# EAGLE board 2_ (EAGLE 5.10)
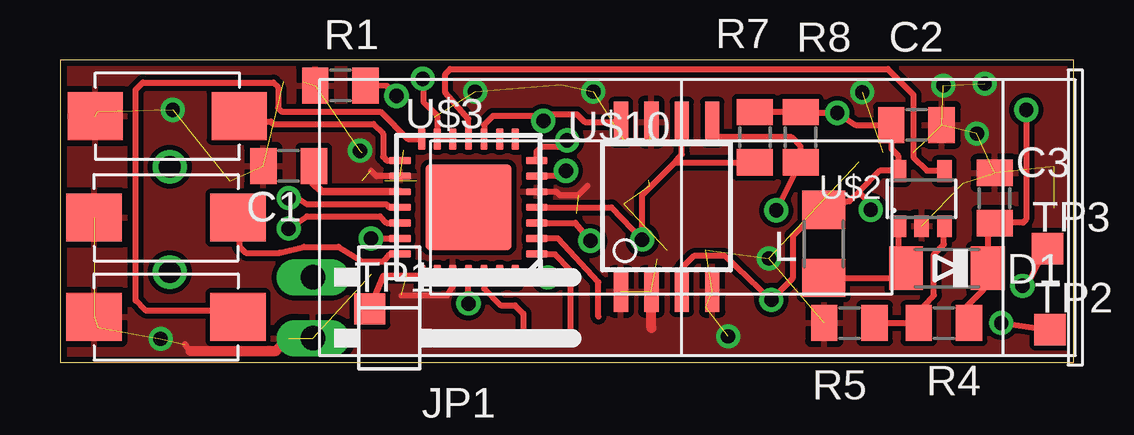
[diagram p0: board, top side]
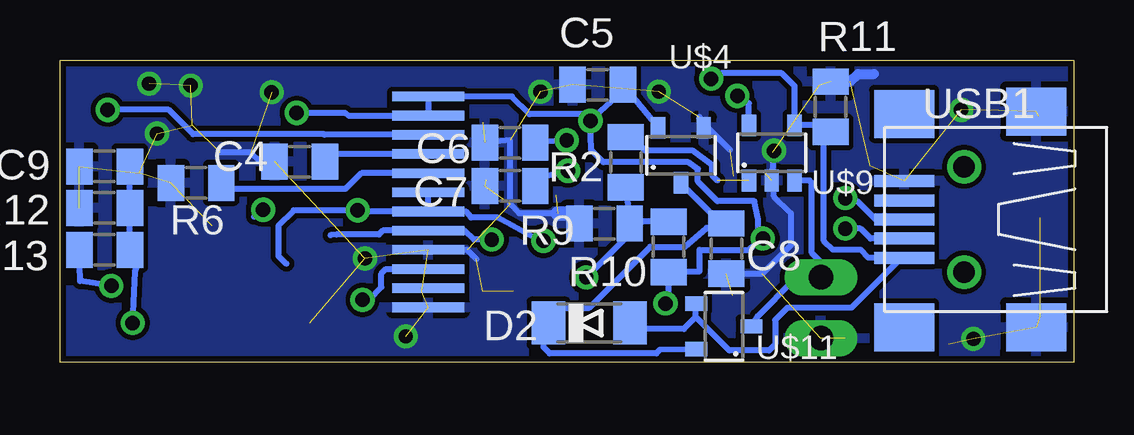
[diagram p1: board, bottom side, seen from below]

Size 42.25 x 12.62 mm. Coordinates in mm from the lower left corner, seen from the top.
Outline: 0,0 42.25,0 42.25,12.62 0,12.62 0,0
Copper layers (1*16): Top 0.035mm / dielectric 1.5mm / Bottom 0.035mm
Design rules "check8": minimum track width 8mil, minimum drill 23mil, track to track 8mil, track to pad 8mil, pad to pad 8mil, via to via 8mil, smd to smd 8mil, copper to edge 10mil, drill to drill 8mil, minimum pad ring 10mil, minimum via ring 8mil, stop-mask expansion 4mil, vias tented up to drill 0mil, thermal gap 10mil

## Footprints (pad centres in the part's own frame; a part is rotated, then mirrored left to right if it is on the bottom)
R0805 = smd 1.1 x 1.5: 1 -1.05,0; 2 1.05,0
MINIMELF = smd 1.4 x 1.8: A 1.7,0; C -1.7,0
1X02/90 = drill 1.016 long: 1 -1.27,-3.81; 2 1.27,-3.81
R1206 = smd 1.6 x 1.803: 1 -1.422,0; 2 1.422,0
TP13SQ = smd 1.3 x 1.3: TP 0,0
DEP096032B-F = smd 3 x 0.4 bottom: 1 1,-4.05; 2 1,-3.25; 3 1,-2.45; 4 1,-1.65; 5 1,-0.85; 6 1,-0.05; 7 1,0.75; 8 1,1.55; 9 1,2.35; 10 1,3.15; 11 1,3.95; 12 1,4.75
SOT23-5 = smd 0.6 x 0.9: 1 -0.99,-1.17; 2 -0.04,-1.17; 3 0.91,-1.17; 4 0.91,1.13; 5 -0.99,1.13
QFN28 = smd 0.9 x 0.3: 1 -2.85,1.95; 2 -2.85,1.3; 3 -2.85,0.65; 4 -2.85,0; 5 -2.85,-0.65; 6 -2.85,-1.3; 7 -2.85,-1.95; 15 2.85,-1.95; 16 2.85,-1.3; 17 2.85,-0.65; 18 2.85,0; 19 2.85,0.65; 20 2.85,1.3; 21 2.85,1.95 | smd 0.3 x 0.9: 8 -1.95,-2.85; 9 -1.3,-2.85; 10 -0.65,-2.85; 11 0,-2.85; 12 0.65,-2.85; 13 1.3,-2.85; 14 1.95,-2.85; 22 1.95,2.85; 23 1.3,2.85; 24 0.65,2.85; 25 0,2.85; 26 -0.65,2.85; 27 -1.3,2.85; 28 -1.95,2.85 | smd 3.6 x 3.6: 29 0,0
SOT23-3 = smd 0.6 x 0.9: 1 0.91,1.13; 2 -0.99,1.13; 3 -0.04,-1.17
SW_SMD_MINI = smd 2.3 x 2: 1 3,0; 2 -3,0
SO-08_208 = smd 0.6 x 1.7: 1 -1.905,-3.43; 2 -0.635,-3.43; 3 0.635,-3.43; 4 1.905,-3.43; 5 1.905,3.63; 6 0.635,3.63; 7 -0.635,3.63; 8 -1.905,3.63
USB-MB-S = smd 2.5 x 0.5: D+ 2.5,0; D- 2.5,0.8; GND 2.5,-1.6; ID 2.5,-0.8; VBUS 2.5,1.6 | smd 2.5 x 2: GND@1 -3,4.5; GND@2 2.5,4.5; GND@3 -3,-4.5; GND@4 2.5,-4.4 | drill 0.9 round: P$5 0,2.2; P$6 0,-2.2

## Placement (x,y rotation side)
C1  10u  [R0805]  9.53,8.2 180 top
C2  10u  [R0805]  35.69,9.91 180 top
C3  10u  [R0805]  38.94,6.86 270 top
C4  10u  [R0805]  32.26,8.38 0 bottom
C5  10u  [R0805]  19.84,11.58 0 bottom
C6  DNP  [R0805]  23.5,9.17 180 bottom
C7  DNP  [R0805]  23.5,7.37 180 bottom
C8  10u  [R0805]  14.48,4.75 270 bottom
C9  10N  [R0805]  40.39,8.18 180 bottom
D1  BAT48  [MINIMELF]  36.96,3.94 180 top
D2  BAT48  [MINIMELF]  20.19,1.65 0 bottom
JP1  [1X02/90]  14.35,2.29 270 top
L  10uH  [R1206]  31.83,4.95 90 top
R1  22k  [R0805]  11.68,11.56 0 top
R2  10K  [R0805]  18.67,8.36 90 bottom
R4  1M  [R0805]  36.83,1.65 180 top
R5  110k  [R0805]  32.89,1.65 180 top
R6  1M8  [R0805]  36.58,7.49 180 bottom
R7  2k2  [R0805]  28.96,9.4 270 top
R8  2k2  [R0805]  30.86,9.4 270 top
R9  10K  [R0805]  19.56,5.79 180 bottom
R10  DNP  [R0805]  16.89,4.83 270 bottom
R11  10k  [R0805]  10.13,10.67 90 bottom
R12  560K  [R0805]  40.39,6.45 180 bottom
R13  560K  [R0805]  40.39,4.7 180 bottom
TP1  PTR1TP13SQ  [TP13SQ]  12.9,2.24 0 top
TP2  PTR1TP13SQ  [TP13SQ]  41.25,1.37 0 top
TP3  PTR1TP13SQ  [TP13SQ]  41.15,4.75 0 top
U$1  DEP096032B  [DEP096032B-F]  25.91,6.35 0 top
U$2  LM2705  [SOT23-5]  35.94,6.86 0 top
U$3  PIC24FJ64GB002  [QFN28]  17.02,6.48 180 top
U$4  MCP1702  [SOT23-3]  16.33,8.66 0 bottom
U$5  SWITCH_MINI  [SW_SMD_MINI]  4.42,6.05 0 top
U$6  SWITCH_MINI  [SW_SMD_MINI]  4.47,10.29 0 top
U$7  SWITCH_MINI  [SW_SMD_MINI]  4.42,1.91 0 top
U$9  MCP73831  [SOT23-5]  12.55,8.76 0 bottom
U$10  24LC1025  [SO-08_208]  25.27,6.4 0 top
U$11  SI2333  [SOT23-3]  14.61,1.55 90 bottom
USB1  USB-MB-S  [USB-MB-S]  4.57,5.97 180 bottom

## Library data of the parts
C1-C9 L R1 R2 R4-R13 U$1 U$2 U$4-U$7 U$9 U$11 = _moja
D1 D2 = diode
JP1 = pinhead
TP1-TP3 = testpad
U$3 U$10 = _mcom3
USB1 = con-usb-2

## Nets
+3V3: C2.2 C5.2 L.2 R7.1 R8.1 R10.2 U$1.3 U$1.11 U$1.12 U$2.5 U$3.10 U$3.20 U$3.25 U$4.2 U$10.3 U$10.8
GND: C1.2 C2.1 C3.1 C4.1 C5.1 C6.2 C7.2 C8.2 C9.2 JP1.2 R1.1 R5.2 R6.2 R9.2 R11.2 R12.2 U$1.1 U$1.4 U$2.2 U$3.5 U$3.16 U$3.24 U$4.1 U$5.2 U$6.2 U$7.2 U$9.2 U$10.1 U$10.2 U$10.4 U$10.7 USB1.GND USB1.GND@1 USB1.GND@3
MCLR: U$3.26
N$1: U$3.18 USB1.D+
N$2: U$3.19 USB1.D-
N$3: U$2.4 U$3.11
N$4: C1.1 U$3.17
N$5: R13.2 TP3.TP
N$7: R1.2 U$9.5
N$9: R7.2 U$1.5 U$3.4 U$10.6
N$10: D1.A L.1 U$2.1
N$11: C3.2 D1.C R4.1 U$1.10
N$12: R4.2 R5.1 U$2.3
N$13: R6.1 U$1.8
N$14: C4.2 U$1.9
N$15: U$3.15 U$6.1
N$17: U$3.21 U$5.1
N$18: R8.2 U$1.6 U$1.7 U$3.3 U$10.5
N$19: U$3.14 U$7.1
N$20: C7.1 U$3.6
N$21: C6.1 U$3.7
N$23: R2.1 R9.1 R10.1 U$3.28
N$24: C8.1 D2.C U$4.3 U$11.2
N$25: D2.A R11.1 U$3.12 U$3.13 U$9.4 U$11.1 USB1.VBUS
N$26: TP1.TP U$3.22
N$27: C9.1 R12.1 R13.1 TP2.TP
PGC: U$3.2
PGD: U$3.1
STAT: R2.2 U$9.1
VBAT: JP1.1 U$9.3 U$11.3

## Tracks (layer width: path | path; a pad name or v marks a point on that pad's centre or on a via)
+3V3  (via drill 0.6)
  Top 0.254: R7.1 R8.1 30.51,10.41 v32.38,10.41 33.15,9.91 C2.2 34.64,8.92 34.92,8.64 34.92,8.01 U$2.5 34.94,8 34.16,8 33.27,7.11 | 33.27,7.11 32.89,6.73 L.2 31.72,6.04 31.5,5.84 31.09,5.84 30.53,5.28 30.53,3.5 v29.64,2.62 27.71,4.45 26.42,4.45 25.91,3.94 U$10.3 | U$3.20 v12.96,5.18 12.95,5.21 | U$3.10 17.67,9.92 18.03,10.29 19.68,10.29 v20.14,10.08 20.42,10.36 21.54,10.36 21.87,10.03 U$10.8 | U$3.25 v17.02,2.46 17.07,2.31 | v33.78,6.38 33.78,6.6 33.27,7.11
  Bottom 0.254: U$4.2 18.73,11.53 C5.2 18.64,11.46 v20.14,10.08 | v20.14,10.08 20.4,10.36 22.68,10.36 23.42,11.1 U$1.12 U$1.11 26.92,10.29 30.2,10.29 30.38,10.41 v32.38,10.41 | v29.64,2.62 29.36,2.64 28.85,3.15 28.85,3.71 28.66,3.9 U$1.3 | v17.02,2.46 16.89,2.72 R10.2 16.86,3.81 15.6,3.81 15.6,4.7 13.56,4.7 v12.96,5.18 13.16,5.38 13.16,5.97 13.31,6.73 14.86,6.73 15.67,7.54 15.67,8.08 16.08,8.36 19.61,8.36 20.12,8.87 v20.14,10.08 | v33.78,6.38 34.17,6.09
GND  (via drill 0.6)  (44 unrouted)
  Top 0.254: U$3.5 20.69,7.13 20.83,6.99 21.59,6.99 21.97,7.37 | U$3.16 13.18,7.78 12.95,8 | U$3.24 16.37,3.16 16.13,2.79 14.22,2.79 | 5.21,0.76 5.44,0.48
  Top 0.406: 9.53,1.02 8.99,0.48 5.44,0.48 | 24.64,1.45 U$10.2
  Bottom 0.254: 24.51,7.62 24.55,7.65 | 12.57,8.76 12.49,8.68 U$9.2 12.5,7.58 12.5,6.93 11.79,6.22 11.79,4.9 12.99,3.7 C8.2 | 21.51,6.22 23.11,6.22 23.5,6.6 23.5,9.27 C6.2 | 15.6,10.24 U$4.1 15.25,9.79 14.33,8.87 | U$1.4 25.27,4.7 24.89,4.32 | C4.1 33.91,8.38 34.29,8.76 35.56,8.76
  Bottom 0.406: R11.2 9.31,11.72 8.99,12.04 8.33,12.04
  Bottom 0.61: 21.51,6.22 21.04,6.22 R9.2
  other vias: 27.84,1.09 4.7,10.54 17.3,11.3 4.19,0.99 38.53,11.63 22.23,11.3 12.5,8.84 33.43,11.28 36.8,11.56 29.54,4.34 38.2,9.55
  pour Top: 0.38,0.25 43.05,0.25 43.05,12.45 0.38,12.45
  pour Bottom: 0.38,0.25 43.05,0.25 43.05,12.45 0.38,12.45
MCLR
  Top 0.254: U$3.26 17.67,3.08 18.36,2.39 18.95,2.39 19.3,2.03 19.3,1.03
N$1  (via drill 0.6)
  Top 0.254: v9.53,6.86 9.91,6.86 10.29,6.6 13.59,6.6 13.72,6.48 U$3.18
  Bottom 0.254: USB1.D+ 8.26,5.97 9.02,6.73 9.4,6.73 v9.53,6.86
N$2  (via drill 0.6)
  Top 0.254: U$3.19 13.6,5.83 13.34,6.1 10.29,6.1 v9.53,5.59
  Bottom 0.254: USB1.D- 8.47,5.17 8.89,5.59 v9.53,5.59
N$3
  Top 0.254: U$3.11 17.02,10.16 16.05,11.25 16.05,12.04 16.26,12.24 34.49,12.24 35.56,11.18 35.56,8.56 36.12,8 36.84,8 U$2.4
N$4
  Top 0.254: 10.54,7.49 10.54,8.22 C1.1
  Top 0.305: U$3.17 10.91,7.13 10.54,7.49
N$5  (via drill 0.6)
  Top 0.254: v40.11,3.2 40.36,3.35 40.74,4.12 40.74,4.78 TP3.TP
  Bottom 0.254: R13.2 41.41,3.4 v40.11,3.2
N$7  (via drill 0.6)
  Top 0.254: v14.02,11.12 13.62,11.53 R1.2
  Bottom 0.254: U$9.5 13.54,10.82 v14.02,11.12
N$9  (via drill 0.6)
  Top 0.254: U$3.4 22.99,6.48 v24.26,5.13 24.26,6.99 25.62,8.35 | U$10.6 25.91,8.7 25.62,8.35 | 25.62,8.35 R7.2
  Bottom 0.254: v24.26,5.13 24.99,5.13 25.39,5.5 U$1.5 28.79,5.5 28.96,5.33 30.73,5.33 30.97,5.32
N$10
  Top 0.254: L.1 34.77,3.52 D1.A 34.95,3.86 U$2.1
N$11  (via drill 0.6)
  Top 0.254: R4.1 37.63,2.19 38.48,3.05 38.52,3.7 D1.C 38.66,5.83 C3.2 38.52,5.84 40.13,5.84 40.26,5.97 v40.26,10.54
  Bottom 0.254: v40.26,10.54 37.72,10.54 36.7,9.53 31.24,9.53 31.22,9.5 U$1.10
N$12
  Top 0.254: R5.1 R4.2 35.56,1.91 36.41,2.81 36.41,4.51 36.83,4.93 36.83,5.67 U$2.3
N$13
  Bottom 0.254: U$1.8 29.69,7.9 30.35,7.24 35.18,7.24 35.56,7.62 35.56,7.59 R6.1
N$14
  Bottom 0.254: U$1.9 30.7,8.7 31.01,8.38 C4.2
N$15
  Top 0.254: U$6.1 7.83,10.41 7.82,10.41 8.18,10.06 8.79,10.06 8.89,9.96 13.06,9.96 13.46,9.55 13.46,8.59 13.61,8.43 U$3.15
N$17
  Top 0.254: U$3.21 13.75,4.53 13.49,4.22 12.6,4.22 11.61,4.83 10.16,4.83 9.14,4.57 7.75,4.57 7.49,4.83 7.49,6.05 U$5.1
N$18  (via drill 0.6)
  Top 0.254: U$3.3 21.48,5.83 v22.1,5.08 | v29.84,6.35 R8.2 | U$10.5 27.18,9.65 27.43,9.4 30.48,9.4 30.86,9.02 R8.2 | R8.2
  Bottom 0.254: v22.1,5.08 22.23,5.08 24,6.04 25.12,6.04 25.32,6.3 U$1.6 | U$1.6 U$1.7 | U$1.6 29.8,6.3 v29.84,6.35 32.51,6.35 33.15,5.71 33.15,4.45 32.82,4.12
N$19
  Top 0.254: 7.95,2.29 U$7.1 7.29,2.18 3.56,2.18 3.15,2.59 3.15,11.38 3.45,11.68 8.89,11.68 9.09,11.48 9.09,10.62 9.25,10.46 13.36,10.46 14.5,9.33 U$3.14
N$20  (via drill 0.6)
  Top 0.254: U$3.6 20.8,7.78 v21.08,8
  Bottom 0.254: v21.08,8 22.19,7.75 C7.1
N$21  (via drill 0.6)
  Top 0.254: U$3.7 19.86,8.43 19.86,8.81 20.07,9.02 20.83,9.02 v21.13,9.27
  Bottom 0.254: v21.13,9.27 C6.1
N$23  (via drill 0.6)
  Top 0.254: U$3.28 20.25,3.63 v20.32,3.56
  Bottom 0.254: R9.1 18.54,5.5 | R9.1 18.54,5.3 18.58,5.3 | 18.92,5.33 18.89,5.3 18.58,5.3 | R2.1 18.41,5.62 R9.1 | R10.1 17.97,5.88 R9.1 | 18.58,5.3 v20.32,3.56
N$24
  Bottom 0.254: U$4.3 16.43,7.55 16.51,7.62 15.11,6.22 15.11,5.8 15,5.69 | U$11.2 17.25,0.53 17.4,0.38 21.84,0.38 22.1,0.64 22.1,1.7 D2.C 21.51,2.29 20.19,2.29 17.65,4.83 16.2,4.83 15.31,5.62 15,5.69 | 15,5.69 C8.1
N$25  (via drill 0.6)
  Top 0.254: U$3.12 U$3.13 15.72,10.29 15.14,10.87 15.14,11.81 v15.11,11.84
  Bottom 0.254: 10.41,9.53 10.41,5.08 10.03,4.7 8.89,4.7 8.56,4.37 USB1.VBUS 7.19,4.37 9.27,2.29 11.94,2.29 12.45,1.78 12.45,0.76 12.7,0.51 14.35,0.51 15.75,1.91 | 10.41,9.53 10.79,9.91 11.52,9.91 U$9.4 11.64,11.54 12.17,12.06 14.71,12.06 14.96,11.84 v15.11,11.84 | D2.A 18.29,1.78 18.29,1.65 18.03,1.4 16.26,1.4 15.75,1.91 | 15.49,2.42 U$11.1 15.75,2.45 15.75,1.91 | R11.1 10.32,9.62 10.41,9.53
N$26
  Top 0.254: U$3.22 13.48,3.63 TP1.TP
N$27  (via drill 0.6)
  Top 0.254: v39.22,1.65 TP2.TP
  Bottom 0.254: v39.22,1.65 39.12,3.81 38.96,4.27 38.99,4.92 R13.1 R12.1 C9.1
PGC
  Top 0.254: U$3.2 20.73,5.18 22.43,3.35 22.43,1.91
PGD
  Top 0.254: U$3.1 20.62,4.53 21.26,3.86 21.26,1.08
STAT  (1 unrouted)
  Bottom 0.254: R2.2 18.42,9.41 17.86,8.84 15.88,8.84 15.06,8.23 15.06,7.8 14.86,7.59
VBAT
  Bottom 0.254: U$11.3 13.18,1.93 11.68,3.43 11.05,3.43 JP1.1 10.54,4.19 10.92,4.57 10.92,7.49 11.02,7.59 U$9.3